# EAGLE board cameraCableBoardPanelized3x3 (EAGLE 9.4.2)
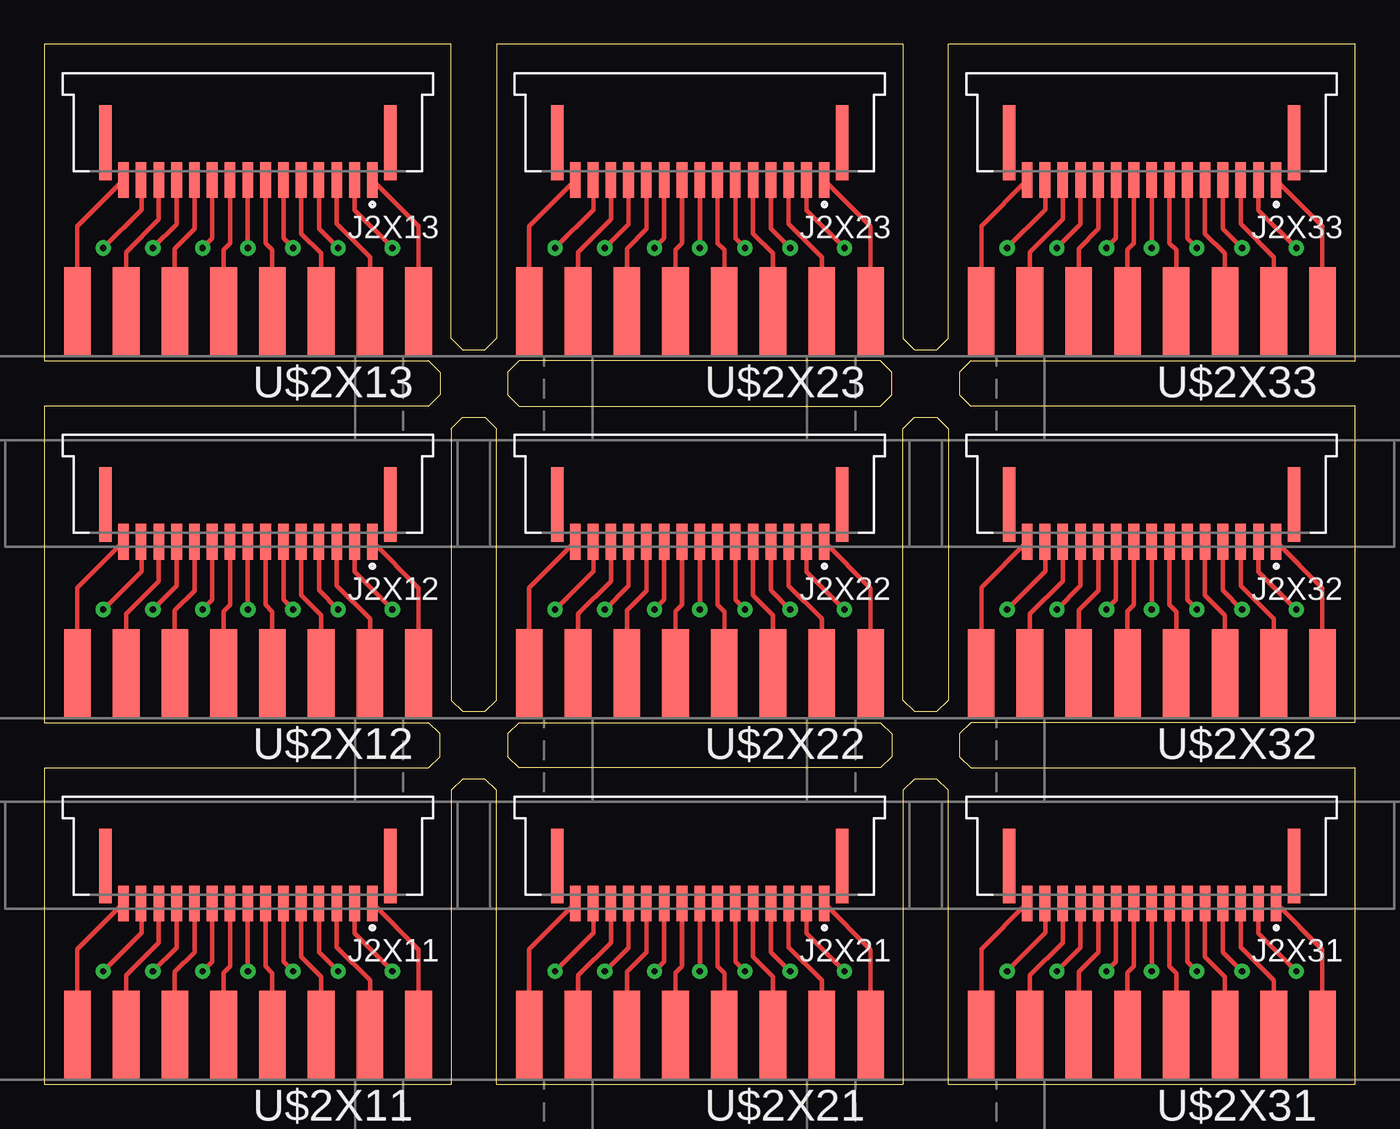
[diagram p0: board, top side]
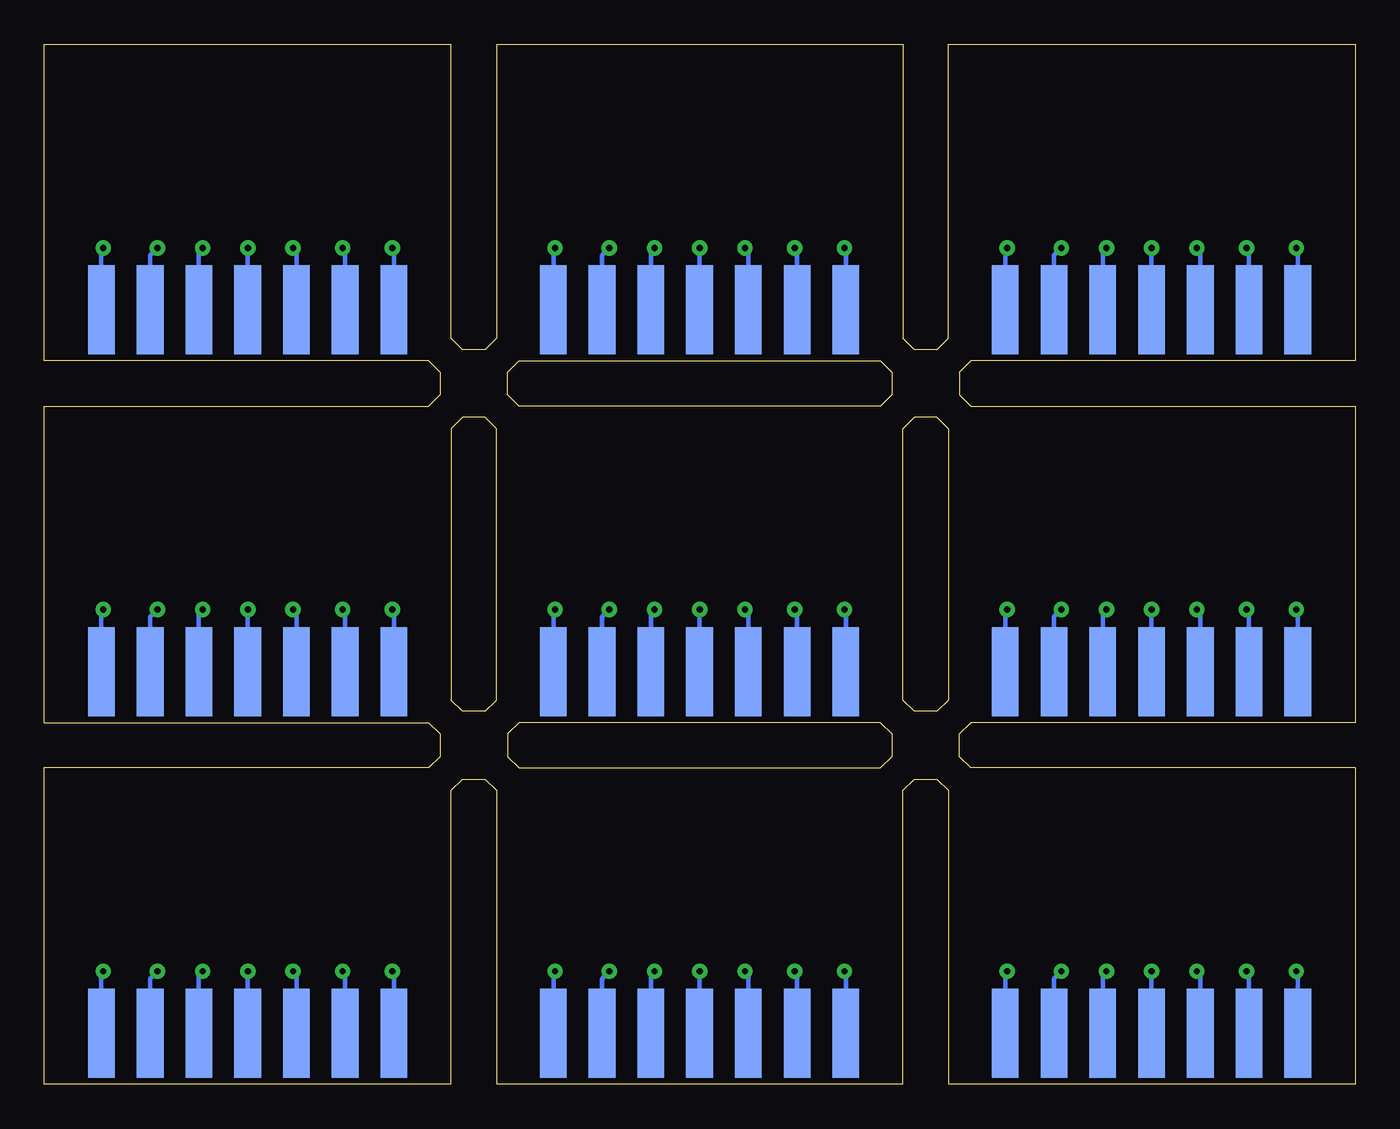
[diagram p1: board, bottom side, seen from below]

Size 73.66 x 58.42 mm. Coordinates in mm from the lower left corner, seen from the top.
Outline: 0,0 22.86,0 22.86,16.51 23.5,17.14 24.77,17.14 25.4,16.51 25.4,0 48.26,0 48.26,16.51 48.9,17.14 50.16,17.14 50.8,16.51 50.8,0 73.66,0 73.66,17.78 52.07,17.78 51.44,18.41 51.44,19.68 52.07,20.32 73.66,20.32 73.66,38.1 52.07,38.1 51.44,38.73 51.44,40.01 52.07,40.64 73.66,40.64 73.66,58.42 50.8,58.42 50.8,41.91 50.16,41.27 48.9,41.27 48.26,41.91 48.26,58.42 25.4,58.42 25.4,41.91 24.77,41.27 23.5,41.27 22.86,41.91 22.86,58.42 0,58.42 0,40.64 21.59,40.64 22.23,40.01 22.23,38.73 21.59,38.1 0,38.1 0,20.32 21.59,20.32 22.23,19.68 22.23,18.41 21.59,17.78 0,17.78 0,0
Outline: 22.86,21.59 23.5,20.95 24.77,20.95 25.4,21.59 25.4,36.83 24.77,37.47 23.5,37.47 22.86,36.83 22.86,21.59
Outline: 26.67,20.32 26.04,19.68 26.04,18.41 26.67,17.78 46.99,17.78 47.62,18.41 47.62,19.68 46.99,20.32 26.67,20.32
Outline: 48.9,20.95 50.16,20.95 50.8,21.59 50.8,36.83 50.16,37.47 48.9,37.47 48.26,36.83 48.26,21.59 48.9,20.95
Outline: 46.99,38.1 47.62,38.73 47.62,40.01 46.99,40.64 26.67,40.64 26.04,40.01 26.04,38.73 26.67,38.1 46.99,38.1
Copper layers (1*16): Top 0.035mm / dielectric 1.5mm / Bottom 0.035mm
Design rules "SparkFun-2-layer-STANDARD_13milDrill": minimum track width 10mil, minimum drill 13mil, track to track 10mil, track to pad 8mil, pad to pad 8mil, via to via 10mil, smd to smd 8mil, copper to edge 8mil, drill to drill 8mil, minimum pad ring 10mil, minimum via ring 10mil, stop-mask expansion 4mil, vias tented up to drill 25mil, thermal gap 10mil

## Footprints (pad centres in the part's own frame; a part is rotated, then mirrored left to right if it is on the bottom)
AMPHENOL_SFW15R-1STE1LF = smd 0.6 x 2: 1 -7,0; 2 -6,0; 3 -5,0; 4 -4,0; 5 -3,0; 6 -2,0; 7 -1,0; 8 0,0; 9 1,0; 10 2,0; 11 3,0; 12 4,0; 13 5,0; 14 6,0; 15 7,0 | smd 0.7 x 4.2: S1 -8,-2.1; S2 8,-2.1
DB15-BOARD-EDGE = smd 1.5 x 5: P1 9.58,-2.5; P2 6.84,-2.5; P3 4.1,-2.5; P4 1.36,-2.5; P5 -1.38,-2.5; P6 -4.12,-2.5; P7 -6.86,-2.5; P8 -9.6,-2.5 | smd 1.5 x 5 bottom: P9 8.21,-2.61; P10 5.47,-2.61; P11 2.73,-2.61; P12 -0.01,-2.61; P13 -2.75,-2.61; P14 -5.49,-2.61; P15 -8.23,-2.61

## Placement (x,y rotation side)
J2X11  [AMPHENOL_SFW15R-1STE1LF]  11.43,10.16 180 top
J2X12  [AMPHENOL_SFW15R-1STE1LF]  11.43,30.48 180 top
J2X13  [AMPHENOL_SFW15R-1STE1LF]  11.43,50.8 180 top
J2X21  [AMPHENOL_SFW15R-1STE1LF]  36.83,10.16 180 top
J2X22  [AMPHENOL_SFW15R-1STE1LF]  36.83,30.48 180 top
J2X23  [AMPHENOL_SFW15R-1STE1LF]  36.83,50.8 180 top
J2X31  [AMPHENOL_SFW15R-1STE1LF]  62.23,10.16 180 top
J2X32  [AMPHENOL_SFW15R-1STE1LF]  62.23,30.48 180 top
J2X33  [AMPHENOL_SFW15R-1STE1LF]  62.23,50.8 180 top
U$2X11  [DB15-BOARD-EDGE]  11.43,0.25 180 top
U$2X12  [DB15-BOARD-EDGE]  11.43,20.57 180 top
U$2X13  [DB15-BOARD-EDGE]  11.43,40.89 180 top
U$2X21  [DB15-BOARD-EDGE]  36.83,0.25 180 top
U$2X22  [DB15-BOARD-EDGE]  36.83,20.57 180 top
U$2X23  [DB15-BOARD-EDGE]  36.83,40.89 180 top
U$2X31  [DB15-BOARD-EDGE]  62.23,0.25 180 top
U$2X32  [DB15-BOARD-EDGE]  62.23,20.57 180 top
U$2X33  [DB15-BOARD-EDGE]  62.23,40.89 180 top

## Library data of the parts
J2X11-J2X13 J2X21-J2X23 J2X31-J2X33 U$2X11-U$2X13 U$2X21-U$2X23 U$2X31-U$2X33 = RPi-Parts

## Nets
CAM1X11: J2X11.1 U$2X11.P8
CAM1X12: J2X12.1 U$2X12.P8
CAM1X13: J2X13.1 U$2X13.P8
CAM1X21: J2X21.1 U$2X21.P8
CAM1X22: J2X22.1 U$2X22.P8
CAM1X23: J2X23.1 U$2X23.P8
CAM1X31: J2X31.1 U$2X31.P8
CAM1X32: J2X32.1 U$2X32.P8
CAM1X33: J2X33.1 U$2X33.P8
CAM2X11: J2X11.2 U$2X11.P15
CAM2X12: J2X12.2 U$2X12.P15
CAM2X13: J2X13.2 U$2X13.P15
CAM2X21: J2X21.2 U$2X21.P15
CAM2X22: J2X22.2 U$2X22.P15
CAM2X23: J2X23.2 U$2X23.P15
CAM2X31: J2X31.2 U$2X31.P15
CAM2X32: J2X32.2 U$2X32.P15
CAM2X33: J2X33.2 U$2X33.P15
CAM3X11: J2X11.3 U$2X11.P7
CAM3X12: J2X12.3 U$2X12.P7
CAM3X13: J2X13.3 U$2X13.P7
CAM3X21: J2X21.3 U$2X21.P7
CAM3X22: J2X22.3 U$2X22.P7
CAM3X23: J2X23.3 U$2X23.P7
CAM3X31: J2X31.3 U$2X31.P7
CAM3X32: J2X32.3 U$2X32.P7
CAM3X33: J2X33.3 U$2X33.P7
CAM4X11: J2X11.4 U$2X11.P14
CAM4X12: J2X12.4 U$2X12.P14
CAM4X13: J2X13.4 U$2X13.P14
CAM4X21: J2X21.4 U$2X21.P14
CAM4X22: J2X22.4 U$2X22.P14
CAM4X23: J2X23.4 U$2X23.P14
CAM4X31: J2X31.4 U$2X31.P14
CAM4X32: J2X32.4 U$2X32.P14
CAM4X33: J2X33.4 U$2X33.P14
CAM5X11: J2X11.5 U$2X11.P6
CAM5X12: J2X12.5 U$2X12.P6
CAM5X13: J2X13.5 U$2X13.P6
CAM5X21: J2X21.5 U$2X21.P6
CAM5X22: J2X22.5 U$2X22.P6
CAM5X23: J2X23.5 U$2X23.P6
CAM5X31: J2X31.5 U$2X31.P6
CAM5X32: J2X32.5 U$2X32.P6
CAM5X33: J2X33.5 U$2X33.P6
CAM6X11: J2X11.6 U$2X11.P13
CAM6X12: J2X12.6 U$2X12.P13
CAM6X13: J2X13.6 U$2X13.P13
CAM6X21: J2X21.6 U$2X21.P13
CAM6X22: J2X22.6 U$2X22.P13
CAM6X23: J2X23.6 U$2X23.P13
CAM6X31: J2X31.6 U$2X31.P13
CAM6X32: J2X32.6 U$2X32.P13
CAM6X33: J2X33.6 U$2X33.P13
CAM7X11: J2X11.7 U$2X11.P5
CAM7X12: J2X12.7 U$2X12.P5
CAM7X13: J2X13.7 U$2X13.P5
CAM7X21: J2X21.7 U$2X21.P5
CAM7X22: J2X22.7 U$2X22.P5
CAM7X23: J2X23.7 U$2X23.P5
CAM7X31: J2X31.7 U$2X31.P5
CAM7X32: J2X32.7 U$2X32.P5
CAM7X33: J2X33.7 U$2X33.P5
CAM8X11: J2X11.8 U$2X11.P12
CAM8X12: J2X12.8 U$2X12.P12
CAM8X13: J2X13.8 U$2X13.P12
CAM8X21: J2X21.8 U$2X21.P12
CAM8X22: J2X22.8 U$2X22.P12
CAM8X23: J2X23.8 U$2X23.P12
CAM8X31: J2X31.8 U$2X31.P12
CAM8X32: J2X32.8 U$2X32.P12
CAM8X33: J2X33.8 U$2X33.P12
CAM9X11: J2X11.9 U$2X11.P4
CAM9X12: J2X12.9 U$2X12.P4
CAM9X13: J2X13.9 U$2X13.P4
CAM9X21: J2X21.9 U$2X21.P4
CAM9X22: J2X22.9 U$2X22.P4
CAM9X23: J2X23.9 U$2X23.P4
CAM9X31: J2X31.9 U$2X31.P4
CAM9X32: J2X32.9 U$2X32.P4
CAM9X33: J2X33.9 U$2X33.P4
CAM10X11: J2X11.10 U$2X11.P11
CAM10X12: J2X12.10 U$2X12.P11
CAM10X13: J2X13.10 U$2X13.P11
CAM10X21: J2X21.10 U$2X21.P11
CAM10X22: J2X22.10 U$2X22.P11
CAM10X23: J2X23.10 U$2X23.P11
CAM10X31: J2X31.10 U$2X31.P11
CAM10X32: J2X32.10 U$2X32.P11
CAM10X33: J2X33.10 U$2X33.P11
CAM11X11: J2X11.11 U$2X11.P3
CAM11X12: J2X12.11 U$2X12.P3
CAM11X13: J2X13.11 U$2X13.P3
CAM11X21: J2X21.11 U$2X21.P3
CAM11X22: J2X22.11 U$2X22.P3
CAM11X23: J2X23.11 U$2X23.P3
CAM11X31: J2X31.11 U$2X31.P3
CAM11X32: J2X32.11 U$2X32.P3
CAM11X33: J2X33.11 U$2X33.P3
CAM12X11: J2X11.12 U$2X11.P10
CAM12X12: J2X12.12 U$2X12.P10
CAM12X13: J2X13.12 U$2X13.P10
CAM12X21: J2X21.12 U$2X21.P10
CAM12X22: J2X22.12 U$2X22.P10
CAM12X23: J2X23.12 U$2X23.P10
CAM12X31: J2X31.12 U$2X31.P10
CAM12X32: J2X32.12 U$2X32.P10
CAM12X33: J2X33.12 U$2X33.P10
CAM13X11: J2X11.13 U$2X11.P2
CAM13X12: J2X12.13 U$2X12.P2
CAM13X13: J2X13.13 U$2X13.P2
CAM13X21: J2X21.13 U$2X21.P2
CAM13X22: J2X22.13 U$2X22.P2
CAM13X23: J2X23.13 U$2X23.P2
CAM13X31: J2X31.13 U$2X31.P2
CAM13X32: J2X32.13 U$2X32.P2
CAM13X33: J2X33.13 U$2X33.P2
CAM14X11: J2X11.14 U$2X11.P9
CAM14X12: J2X12.14 U$2X12.P9
CAM14X13: J2X13.14 U$2X13.P9
CAM14X21: J2X21.14 U$2X21.P9
CAM14X22: J2X22.14 U$2X22.P9
CAM14X23: J2X23.14 U$2X23.P9
CAM14X31: J2X31.14 U$2X31.P9
CAM14X32: J2X32.14 U$2X32.P9
CAM14X33: J2X33.14 U$2X33.P9
CAM15X11: J2X11.15 U$2X11.P1
CAM15X12: J2X12.15 U$2X12.P1
CAM15X13: J2X13.15 U$2X13.P1
CAM15X21: J2X21.15 U$2X21.P1
CAM15X22: J2X22.15 U$2X22.P1
CAM15X23: J2X23.15 U$2X23.P1
CAM15X31: J2X31.15 U$2X31.P1
CAM15X32: J2X32.15 U$2X32.P1
CAM15X33: J2X33.15 U$2X33.P1

## Tracks (layer width: path | path; a pad name or v marks a point on that pad's centre or on a via)
CAM1X11
  Top 0.254: U$2X11.P8 21.03,7.56 J2X11.1
CAM1X12
  Top 0.254: U$2X12.P8 21.03,27.88 J2X12.1
CAM1X13
  Top 0.254: U$2X13.P8 21.03,48.2 J2X13.1
CAM1X21
  Top 0.254: U$2X21.P8 46.43,7.56 J2X21.1
CAM1X22
  Top 0.254: U$2X22.P8 46.43,27.88 J2X22.1
CAM1X23
  Top 0.254: U$2X23.P8 46.43,48.2 J2X23.1
CAM1X31
  Top 0.254: U$2X31.P8 71.83,7.56 J2X31.1
CAM1X32
  Top 0.254: U$2X32.P8 71.83,27.88 J2X32.1
CAM1X33
  Top 0.254: U$2X33.P8 71.83,48.2 J2X33.1
CAM2X11  (via drill 0.35 pad 0.86)
  Top 0.254: v19.56,6.35 17.43,8.48 J2X11.2
  Bottom 0.254: U$2X11.P15 19.66,6.25 v19.56,6.35
CAM2X12  (via drill 0.35 pad 0.86)
  Top 0.254: v19.56,26.67 17.43,28.8 J2X12.2
  Bottom 0.254: U$2X12.P15 19.66,26.57 v19.56,26.67
CAM2X13  (via drill 0.35 pad 0.86)
  Top 0.254: v19.56,46.99 17.43,49.12 J2X13.2
  Bottom 0.254: U$2X13.P15 19.66,46.89 v19.56,46.99
CAM2X21  (via drill 0.35 pad 0.86)
  Top 0.254: v44.96,6.35 42.83,8.48 J2X21.2
  Bottom 0.254: U$2X21.P15 45.06,6.25 v44.96,6.35
CAM2X22  (via drill 0.35 pad 0.86)
  Top 0.254: v44.96,26.67 42.83,28.8 J2X22.2
  Bottom 0.254: U$2X22.P15 45.06,26.57 v44.96,26.67
CAM2X23  (via drill 0.35 pad 0.86)
  Top 0.254: v44.96,46.99 42.83,49.12 J2X23.2
  Bottom 0.254: U$2X23.P15 45.06,46.89 v44.96,46.99
CAM2X31  (via drill 0.35 pad 0.86)
  Top 0.254: v70.36,6.35 68.23,8.48 J2X31.2
  Bottom 0.254: U$2X31.P15 70.46,6.25 v70.36,6.35
CAM2X32  (via drill 0.35 pad 0.86)
  Top 0.254: v70.36,26.67 68.23,28.8 J2X32.2
  Bottom 0.254: U$2X32.P15 70.46,26.57 v70.36,26.67
CAM2X33  (via drill 0.35 pad 0.86)
  Top 0.254: v70.36,46.99 68.23,49.12 J2X33.2
  Bottom 0.254: U$2X33.P15 70.46,46.89 v70.36,46.99
CAM3X11
  Top 0.254: U$2X11.P7 18.29,5.84 16.43,7.7 J2X11.3
CAM3X12
  Top 0.254: U$2X12.P7 18.29,26.16 16.43,28.02 J2X12.3
CAM3X13
  Top 0.254: U$2X13.P7 18.29,46.48 16.43,48.34 J2X13.3
CAM3X21
  Top 0.254: U$2X21.P7 43.69,5.84 41.83,7.7 J2X21.3
CAM3X22
  Top 0.254: U$2X22.P7 43.69,26.16 41.83,28.02 J2X22.3
CAM3X23
  Top 0.254: U$2X23.P7 43.69,46.48 41.83,48.34 J2X23.3
CAM3X31
  Top 0.254: U$2X31.P7 69.09,5.84 67.23,7.7 J2X31.3
CAM3X32
  Top 0.254: U$2X32.P7 69.09,26.16 67.23,28.02 J2X32.3
CAM3X33
  Top 0.254: U$2X33.P7 69.09,46.48 67.23,48.34 J2X33.3
CAM4X11  (via drill 0.35 pad 0.86)
  Top 0.254: v16.51,6.35 15.43,7.43 J2X11.4
  Bottom 0.254: U$2X11.P14 16.92,5.94 v16.51,6.35
CAM4X12  (via drill 0.35 pad 0.86)
  Top 0.254: v16.51,26.67 15.43,27.75 J2X12.4
  Bottom 0.254: U$2X12.P14 16.92,26.26 v16.51,26.67
CAM4X13  (via drill 0.35 pad 0.86)
  Top 0.254: v16.51,46.99 15.43,48.07 J2X13.4
  Bottom 0.254: U$2X13.P14 16.92,46.58 v16.51,46.99
CAM4X21  (via drill 0.35 pad 0.86)
  Top 0.254: v41.91,6.35 40.83,7.43 J2X21.4
  Bottom 0.254: U$2X21.P14 42.32,5.94 v41.91,6.35
CAM4X22  (via drill 0.35 pad 0.86)
  Top 0.254: v41.91,26.67 40.83,27.75 J2X22.4
  Bottom 0.254: U$2X22.P14 42.32,26.26 v41.91,26.67
CAM4X23  (via drill 0.35 pad 0.86)
  Top 0.254: v41.91,46.99 40.83,48.07 J2X23.4
  Bottom 0.254: U$2X23.P14 42.32,46.58 v41.91,46.99
CAM4X31  (via drill 0.35 pad 0.86)
  Top 0.254: v67.31,6.35 66.23,7.43 J2X31.4
  Bottom 0.254: U$2X31.P14 67.72,5.94 v67.31,6.35
CAM4X32  (via drill 0.35 pad 0.86)
  Top 0.254: v67.31,26.67 66.23,27.75 J2X32.4
  Bottom 0.254: U$2X32.P14 67.72,26.26 v67.31,26.67
CAM4X33  (via drill 0.35 pad 0.86)
  Top 0.254: v67.31,46.99 66.23,48.07 J2X33.4
  Bottom 0.254: U$2X33.P14 67.72,46.58 v67.31,46.99
CAM5X11
  Top 0.254: U$2X11.P6 15.55,6.04 14.43,7.16 J2X11.5
CAM5X12
  Top 0.254: U$2X12.P6 15.55,26.36 14.43,27.48 J2X12.5
CAM5X13
  Top 0.254: U$2X13.P6 15.55,46.68 14.43,47.8 J2X13.5
CAM5X21
  Top 0.254: U$2X21.P6 40.95,6.04 39.83,7.16 J2X21.5
CAM5X22
  Top 0.254: U$2X22.P6 40.95,26.36 39.83,27.48 J2X22.5
CAM5X23
  Top 0.254: U$2X23.P6 40.95,46.68 39.83,47.8 J2X23.5
CAM5X31
  Top 0.254: U$2X31.P6 66.35,6.04 65.23,7.16 J2X31.5
CAM5X32
  Top 0.254: U$2X32.P6 66.35,26.36 65.23,27.48 J2X32.5
CAM5X33
  Top 0.254: U$2X33.P6 66.35,46.68 65.23,47.8 J2X33.5
CAM6X11  (via drill 0.35 pad 0.86)
  Top 0.254: v13.97,6.35 13.43,6.89 J2X11.6
  Bottom 0.254: U$2X11.P13 14.18,6.14 v13.97,6.35
CAM6X12  (via drill 0.35 pad 0.86)
  Top 0.254: v13.97,26.67 13.43,27.21 J2X12.6
  Bottom 0.254: U$2X12.P13 14.18,26.46 v13.97,26.67
CAM6X13  (via drill 0.35 pad 0.86)
  Top 0.254: v13.97,46.99 13.43,47.53 J2X13.6
  Bottom 0.254: U$2X13.P13 14.18,46.78 v13.97,46.99
CAM6X21  (via drill 0.35 pad 0.86)
  Top 0.254: v39.37,6.35 38.83,6.89 J2X21.6
  Bottom 0.254: U$2X21.P13 39.58,6.14 v39.37,6.35
CAM6X22  (via drill 0.35 pad 0.86)
  Top 0.254: v39.37,26.67 38.83,27.21 J2X22.6
  Bottom 0.254: U$2X22.P13 39.58,26.46 v39.37,26.67
CAM6X23  (via drill 0.35 pad 0.86)
  Top 0.254: v39.37,46.99 38.83,47.53 J2X23.6
  Bottom 0.254: U$2X23.P13 39.58,46.78 v39.37,46.99
CAM6X31  (via drill 0.35 pad 0.86)
  Top 0.254: v64.77,6.35 64.23,6.89 J2X31.6
  Bottom 0.254: U$2X31.P13 64.98,6.14 v64.77,6.35
CAM6X32  (via drill 0.35 pad 0.86)
  Top 0.254: v64.77,26.67 64.23,27.21 J2X32.6
  Bottom 0.254: U$2X32.P13 64.98,26.46 v64.77,26.67
CAM6X33  (via drill 0.35 pad 0.86)
  Top 0.254: v64.77,46.99 64.23,47.53 J2X33.6
  Bottom 0.254: U$2X33.P13 64.98,46.78 v64.77,46.99
CAM7X11
  Top 0.254: U$2X11.P5 12.81,6.24 12.43,6.62 J2X11.7
CAM7X12
  Top 0.254: U$2X12.P5 12.81,26.56 12.43,26.94 J2X12.7
CAM7X13
  Top 0.254: U$2X13.P5 12.81,46.88 12.43,47.26 J2X13.7
CAM7X21
  Top 0.254: U$2X21.P5 38.21,6.24 37.83,6.62 J2X21.7
CAM7X22
  Top 0.254: U$2X22.P5 38.21,26.56 37.83,26.94 J2X22.7
CAM7X23
  Top 0.254: U$2X23.P5 38.21,46.88 37.83,47.26 J2X23.7
CAM7X31
  Top 0.254: U$2X31.P5 63.61,6.24 63.23,6.62 J2X31.7
CAM7X32
  Top 0.254: U$2X32.P5 63.61,26.56 63.23,26.94 J2X32.7
CAM7X33
  Top 0.254: U$2X33.P5 63.61,46.88 63.23,47.26 J2X33.7
CAM8X11  (via drill 0.35 pad 0.86)
  Top 0.254: v11.43,6.35 J2X11.8
  Bottom 0.254: U$2X11.P12 v11.44,6.34 v11.43,6.35
CAM8X12  (via drill 0.35 pad 0.86)
  Top 0.254: v11.43,26.67 J2X12.8
  Bottom 0.254: U$2X12.P12 v11.44,26.66 v11.43,26.67
CAM8X13  (via drill 0.35 pad 0.86)
  Top 0.254: v11.43,46.99 J2X13.8
  Bottom 0.254: U$2X13.P12 v11.44,46.98 v11.43,46.99
CAM8X21  (via drill 0.35 pad 0.86)
  Top 0.254: v36.83,6.35 J2X21.8
  Bottom 0.254: U$2X21.P12 v36.84,6.34 v36.83,6.35
CAM8X22  (via drill 0.35 pad 0.86)
  Top 0.254: v36.83,26.67 J2X22.8
  Bottom 0.254: U$2X22.P12 v36.84,26.66 v36.83,26.67
CAM8X23  (via drill 0.35 pad 0.86)
  Top 0.254: v36.83,46.99 J2X23.8
  Bottom 0.254: U$2X23.P12 v36.84,46.98 v36.83,46.99
CAM8X31  (via drill 0.35 pad 0.86)
  Top 0.254: v62.23,6.35 J2X31.8
  Bottom 0.254: U$2X31.P12 v62.24,6.34 v62.23,6.35
CAM8X32  (via drill 0.35 pad 0.86)
  Top 0.254: v62.23,26.67 J2X32.8
  Bottom 0.254: U$2X32.P12 v62.24,26.66 v62.23,26.67
CAM8X33  (via drill 0.35 pad 0.86)
  Top 0.254: v62.23,46.99 J2X33.8
  Bottom 0.254: U$2X33.P12 v62.24,46.98 v62.23,46.99
CAM9X11
  Top 0.254: U$2X11.P4 10.07,6.26 10.43,6.62 J2X11.9
CAM9X12
  Top 0.254: U$2X12.P4 10.07,26.58 10.43,26.94 J2X12.9
CAM9X13
  Top 0.254: U$2X13.P4 10.07,46.9 10.43,47.26 J2X13.9
CAM9X21
  Top 0.254: U$2X21.P4 35.47,6.26 35.83,6.62 J2X21.9
CAM9X22
  Top 0.254: U$2X22.P4 35.47,26.58 35.83,26.94 J2X22.9
CAM9X23
  Top 0.254: U$2X23.P4 35.47,46.9 35.83,47.26 J2X23.9
CAM9X31
  Top 0.254: U$2X31.P4 60.87,6.26 61.23,6.62 J2X31.9
CAM9X32
  Top 0.254: U$2X32.P4 60.87,26.58 61.23,26.94 J2X32.9
CAM9X33
  Top 0.254: U$2X33.P4 60.87,46.9 61.23,47.26 J2X33.9
CAM10X11  (via drill 0.35 pad 0.86)
  Top 0.254: v8.89,6.35 9.43,6.89 J2X11.10
  Bottom 0.254: U$2X11.P11 8.7,6.16 v8.89,6.35
CAM10X12  (via drill 0.35 pad 0.86)
  Top 0.254: v8.89,26.67 9.43,27.21 J2X12.10
  Bottom 0.254: U$2X12.P11 8.7,26.48 v8.89,26.67
CAM10X13  (via drill 0.35 pad 0.86)
  Top 0.254: v8.89,46.99 9.43,47.53 J2X13.10
  Bottom 0.254: U$2X13.P11 8.7,46.8 v8.89,46.99
CAM10X21  (via drill 0.35 pad 0.86)
  Top 0.254: v34.29,6.35 34.83,6.89 J2X21.10
  Bottom 0.254: U$2X21.P11 34.1,6.16 v34.29,6.35
CAM10X22  (via drill 0.35 pad 0.86)
  Top 0.254: v34.29,26.67 34.83,27.21 J2X22.10
  Bottom 0.254: U$2X22.P11 34.1,26.48 v34.29,26.67
CAM10X23  (via drill 0.35 pad 0.86)
  Top 0.254: v34.29,46.99 34.83,47.53 J2X23.10
  Bottom 0.254: U$2X23.P11 34.1,46.8 v34.29,46.99
CAM10X31  (via drill 0.35 pad 0.86)
  Top 0.254: v59.69,6.35 60.23,6.89 J2X31.10
  Bottom 0.254: U$2X31.P11 59.5,6.16 v59.69,6.35
CAM10X32  (via drill 0.35 pad 0.86)
  Top 0.254: v59.69,26.67 60.23,27.21 J2X32.10
  Bottom 0.254: U$2X32.P11 59.5,26.48 v59.69,26.67
CAM10X33  (via drill 0.35 pad 0.86)
  Top 0.254: v59.69,46.99 60.23,47.53 J2X33.10
  Bottom 0.254: U$2X33.P11 59.5,46.8 v59.69,46.99
CAM11X11
  Top 0.254: U$2X11.P3 7.33,6.31 8.43,7.41 J2X11.11
CAM11X12
  Top 0.254: U$2X12.P3 7.33,26.63 8.43,27.73 J2X12.11
CAM11X13
  Top 0.254: U$2X13.P3 7.33,46.95 8.43,48.05 J2X13.11
CAM11X21
  Top 0.254: U$2X21.P3 32.73,6.31 33.83,7.41 J2X21.11
CAM11X22
  Top 0.254: U$2X22.P3 32.73,26.63 33.83,27.73 J2X22.11
CAM11X23
  Top 0.254: U$2X23.P3 32.73,46.95 33.83,48.05 J2X23.11
CAM11X31
  Top 0.254: U$2X31.P3 58.13,6.31 59.23,7.41 J2X31.11
CAM11X32
  Top 0.254: U$2X32.P3 58.13,26.63 59.23,27.73 J2X32.11
CAM11X33
  Top 0.254: U$2X33.P3 58.13,46.95 59.23,48.05 J2X33.11
CAM12X11  (via drill 0.35 pad 0.86)
  Top 0.254: v6.1,6.35 7.43,7.68 J2X11.12
  Bottom 0.254: U$2X11.P10 5.96,6.21 v6.1,6.35
CAM12X12  (via drill 0.35 pad 0.86)
  Top 0.254: v6.1,26.67 7.43,28 J2X12.12
  Bottom 0.254: U$2X12.P10 5.96,26.53 v6.1,26.67
CAM12X13  (via drill 0.35 pad 0.86)
  Top 0.254: v6.1,46.99 7.43,48.32 J2X13.12
  Bottom 0.254: U$2X13.P10 5.96,46.85 v6.1,46.99
CAM12X21  (via drill 0.35 pad 0.86)
  Top 0.254: v31.5,6.35 32.83,7.68 J2X21.12
  Bottom 0.254: U$2X21.P10 31.36,6.21 v31.5,6.35
CAM12X22  (via drill 0.35 pad 0.86)
  Top 0.254: v31.5,26.67 32.83,28 J2X22.12
  Bottom 0.254: U$2X22.P10 31.36,26.53 v31.5,26.67
CAM12X23  (via drill 0.35 pad 0.86)
  Top 0.254: v31.5,46.99 32.83,48.32 J2X23.12
  Bottom 0.254: U$2X23.P10 31.36,46.85 v31.5,46.99
CAM12X31  (via drill 0.35 pad 0.86)
  Top 0.254: v56.9,6.35 58.23,7.68 J2X31.12
  Bottom 0.254: U$2X31.P10 56.76,6.21 v56.9,6.35
CAM12X32  (via drill 0.35 pad 0.86)
  Top 0.254: v56.9,26.67 58.23,28 J2X32.12
  Bottom 0.254: U$2X32.P10 56.76,26.53 v56.9,26.67
CAM12X33  (via drill 0.35 pad 0.86)
  Top 0.254: v56.9,46.99 58.23,48.32 J2X33.12
  Bottom 0.254: U$2X33.P10 56.76,46.85 v56.9,46.99
CAM13X11
  Top 0.254: U$2X11.P2 4.59,6.11 6.43,7.95 J2X11.13
CAM13X12
  Top 0.254: U$2X12.P2 4.59,26.43 6.43,28.27 J2X12.13
CAM13X13
  Top 0.254: U$2X13.P2 4.59,46.75 6.43,48.59 J2X13.13
CAM13X21
  Top 0.254: U$2X21.P2 29.99,6.11 31.83,7.95 J2X21.13
CAM13X22
  Top 0.254: U$2X22.P2 29.99,26.43 31.83,28.27 J2X22.13
CAM13X23
  Top 0.254: U$2X23.P2 29.99,46.75 31.83,48.59 J2X23.13
CAM13X31
  Top 0.254: U$2X31.P2 55.39,6.11 57.23,7.95 J2X31.13
CAM13X32
  Top 0.254: U$2X32.P2 55.39,26.43 57.23,28.27 J2X32.13
CAM13X33
  Top 0.254: U$2X33.P2 55.39,46.75 57.23,48.59 J2X33.13
CAM14X11  (via drill 0.35 pad 0.86)
  Top 0.254: v3.3,6.35 5.46,8.51 5.46,10.13 J2X11.14
  Bottom 0.254: U$2X11.P9 3.22,6.27 v3.3,6.35
CAM14X12  (via drill 0.35 pad 0.86)
  Top 0.254: v3.3,26.67 5.46,28.83 5.46,30.45 J2X12.14
  Bottom 0.254: U$2X12.P9 3.22,26.59 v3.3,26.67
CAM14X13  (via drill 0.35 pad 0.86)
  Top 0.254: v3.3,46.99 5.46,49.15 5.46,50.77 J2X13.14
  Bottom 0.254: U$2X13.P9 3.22,46.91 v3.3,46.99
CAM14X21  (via drill 0.35 pad 0.86)
  Top 0.254: v28.7,6.35 30.86,8.51 30.86,10.13 J2X21.14
  Bottom 0.254: U$2X21.P9 28.62,6.27 v28.7,6.35
CAM14X22  (via drill 0.35 pad 0.86)
  Top 0.254: v28.7,26.67 30.86,28.83 30.86,30.45 J2X22.14
  Bottom 0.254: U$2X22.P9 28.62,26.59 v28.7,26.67
CAM14X23  (via drill 0.35 pad 0.86)
  Top 0.254: v28.7,46.99 30.86,49.15 30.86,50.77 J2X23.14
  Bottom 0.254: U$2X23.P9 28.62,46.91 v28.7,46.99
CAM14X31  (via drill 0.35 pad 0.86)
  Top 0.254: v54.1,6.35 56.26,8.51 56.26,10.13 J2X31.14
  Bottom 0.254: U$2X31.P9 54.02,6.27 v54.1,6.35
CAM14X32  (via drill 0.35 pad 0.86)
  Top 0.254: v54.1,26.67 56.26,28.83 56.26,30.45 J2X32.14
  Bottom 0.254: U$2X32.P9 54.02,26.59 v54.1,26.67
CAM14X33  (via drill 0.35 pad 0.86)
  Top 0.254: v54.1,46.99 56.26,49.15 56.26,50.77 J2X33.14
  Bottom 0.254: U$2X33.P9 54.02,46.91 v54.1,46.99
CAM15X11
  Top 0.254: U$2X11.P1 1.85,7.58 J2X11.15
CAM15X12
  Top 0.254: U$2X12.P1 1.85,27.9 J2X12.15
CAM15X13
  Top 0.254: U$2X13.P1 1.85,48.22 J2X13.15
CAM15X21
  Top 0.254: U$2X21.P1 27.25,7.58 J2X21.15
CAM15X22
  Top 0.254: U$2X22.P1 27.25,27.9 J2X22.15
CAM15X23
  Top 0.254: U$2X23.P1 27.25,48.22 J2X23.15
CAM15X31
  Top 0.254: U$2X31.P1 52.65,7.58 J2X31.15
CAM15X32
  Top 0.254: U$2X32.P1 52.65,27.9 J2X32.15
CAM15X33
  Top 0.254: U$2X33.P1 52.65,48.22 J2X33.15

## Text on the board
tDocu: Estimated Clock Skew: 3.8picoseconds | Estimated Clock Skew: 3.8picoseconds | Estimated Clock Skew: 3.8picoseconds | Estimated Clock Skew: 3.8picoseconds | Estimated Clock Skew: 3.8picoseconds | Estimated Clock Skew: 3.8picoseconds | Estimated Clock Skew: 3.8picoseconds | Estimated Clock Skew: 3.8picoseconds | Estimated Clock Skew: 3.8picoseconds